# Altium PCB 2.4寸LCD-OM240DN2L.PcbDoc
Units mm, origin at the board's own origin, x right, y up, seen from the top; angles counter-clockwise.
Board outline 54 x 61 mm, 2 copper layers (Top Layer, Bottom Layer), stack 1.571 mm thick; 16 components, 30 nets, 125 pads, 87 vias.
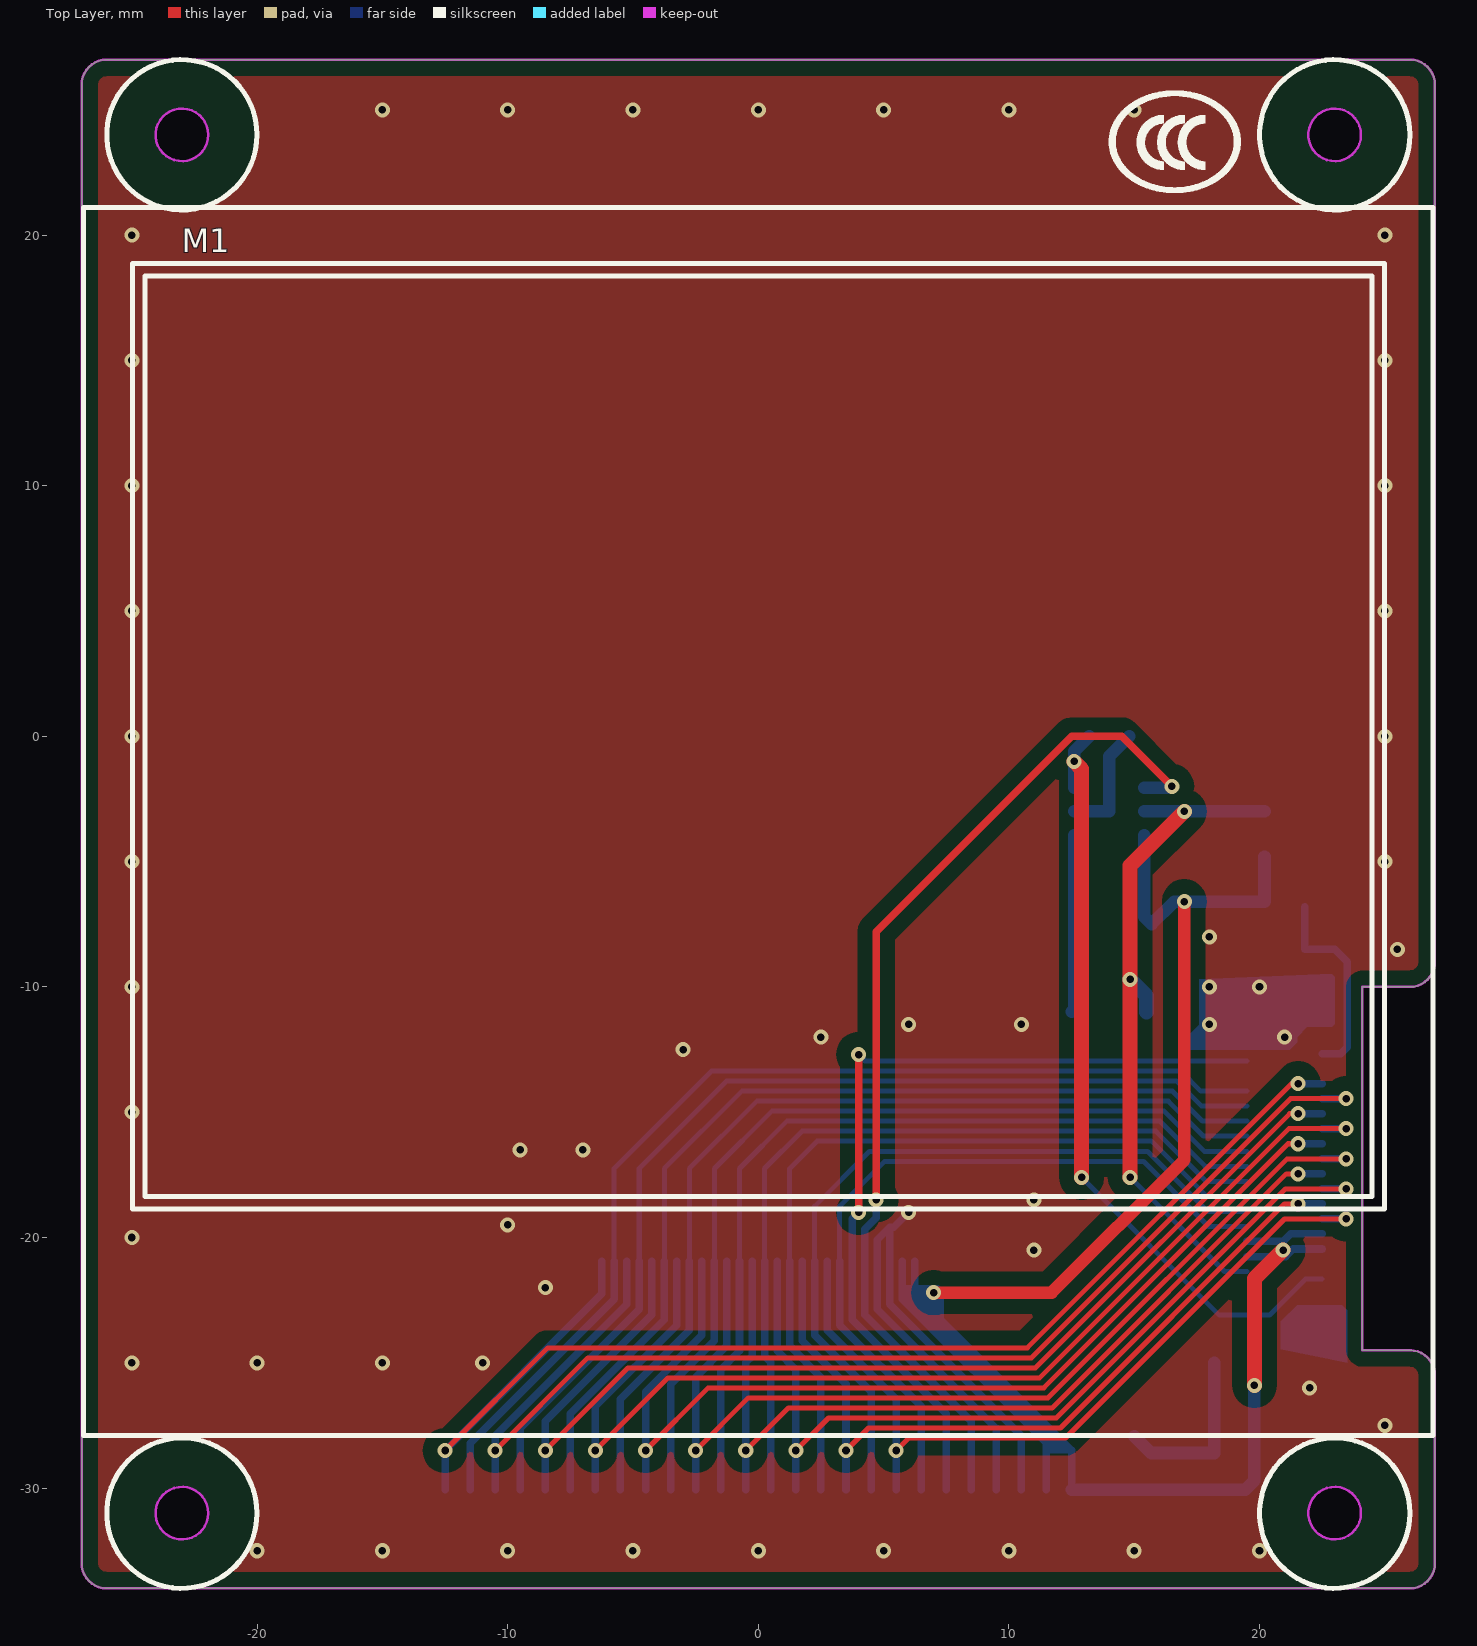
[diagram p0: Top Layer view]
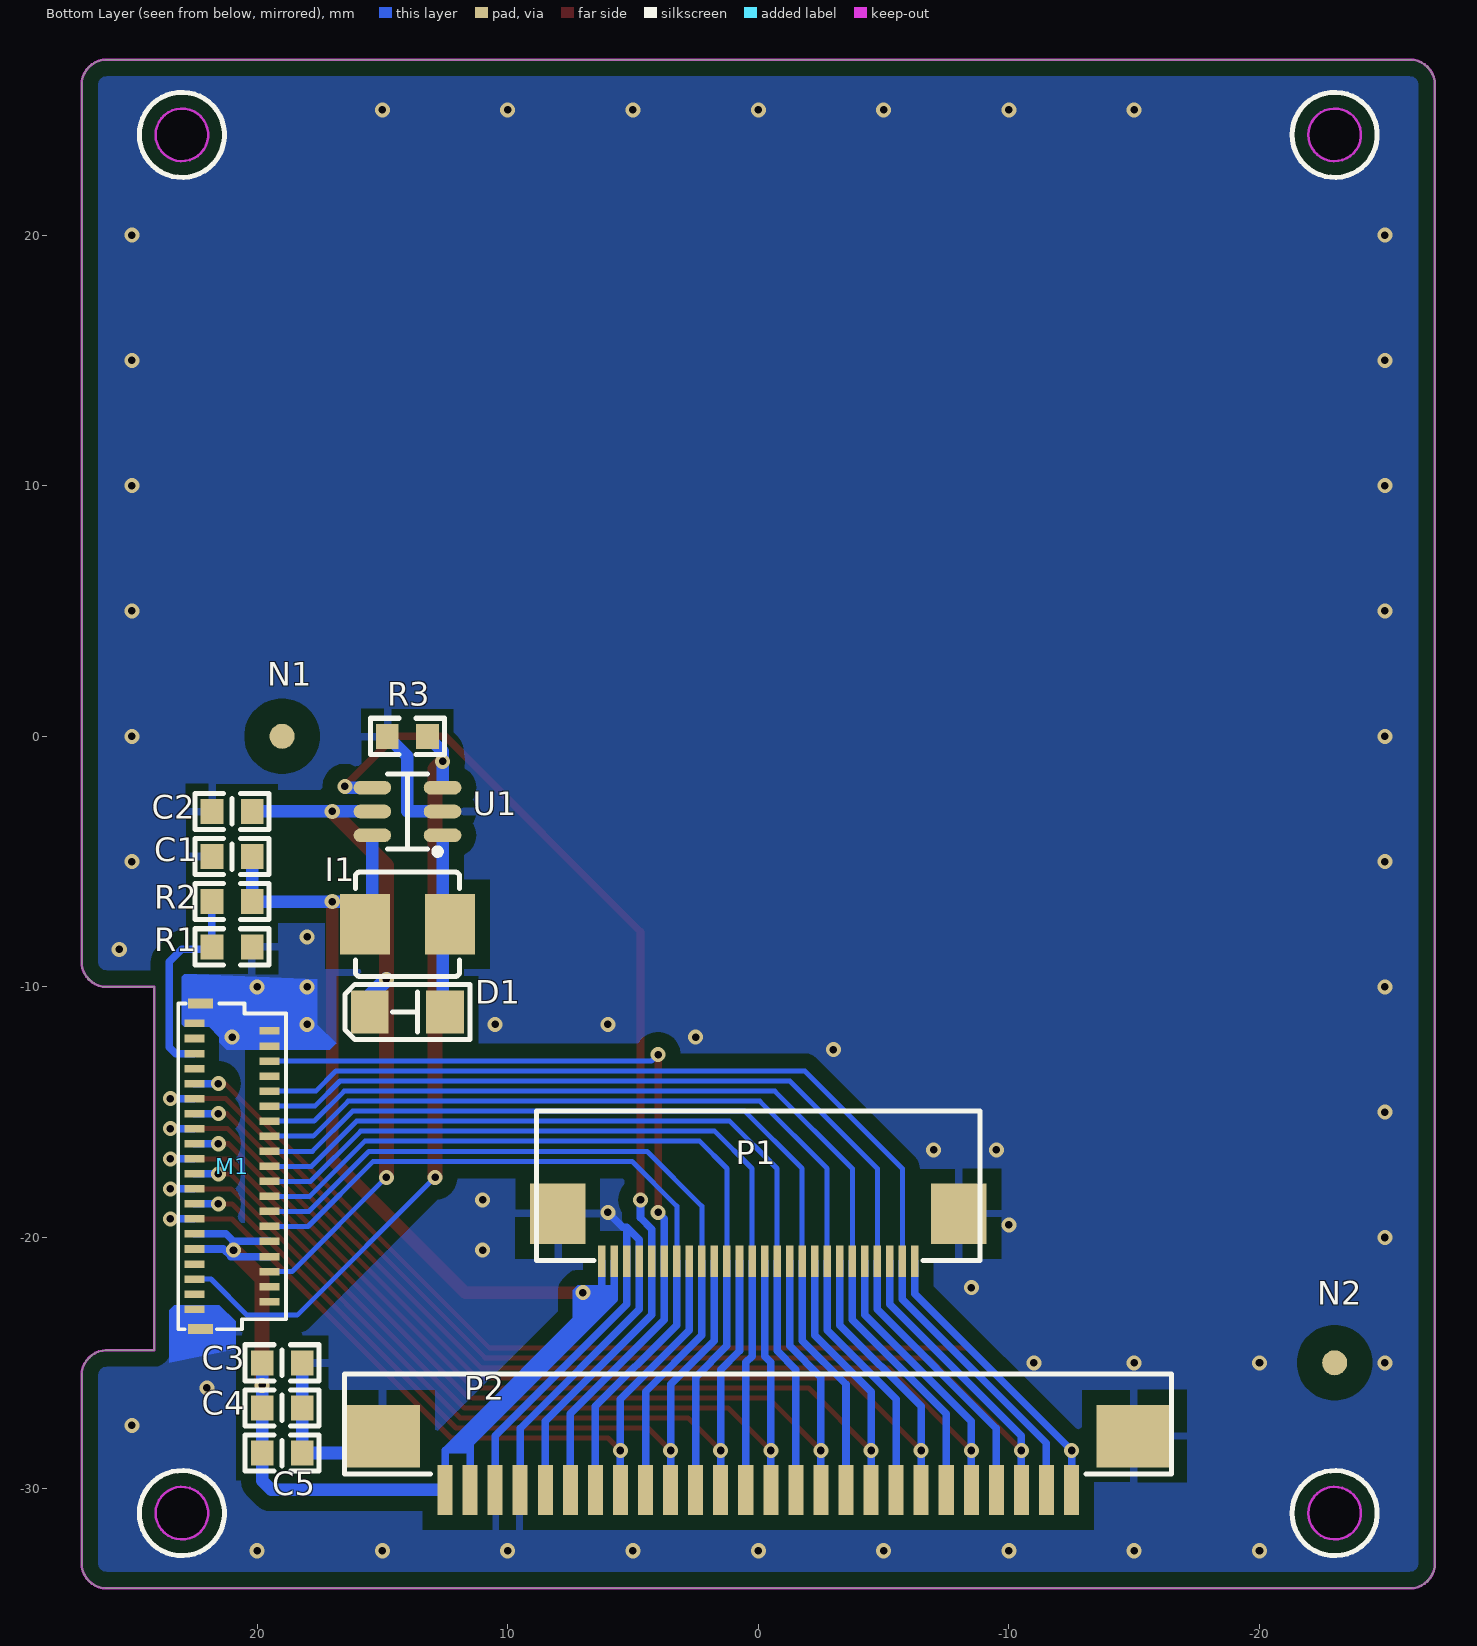
[diagram p1: Bottom Layer view, seen from below]
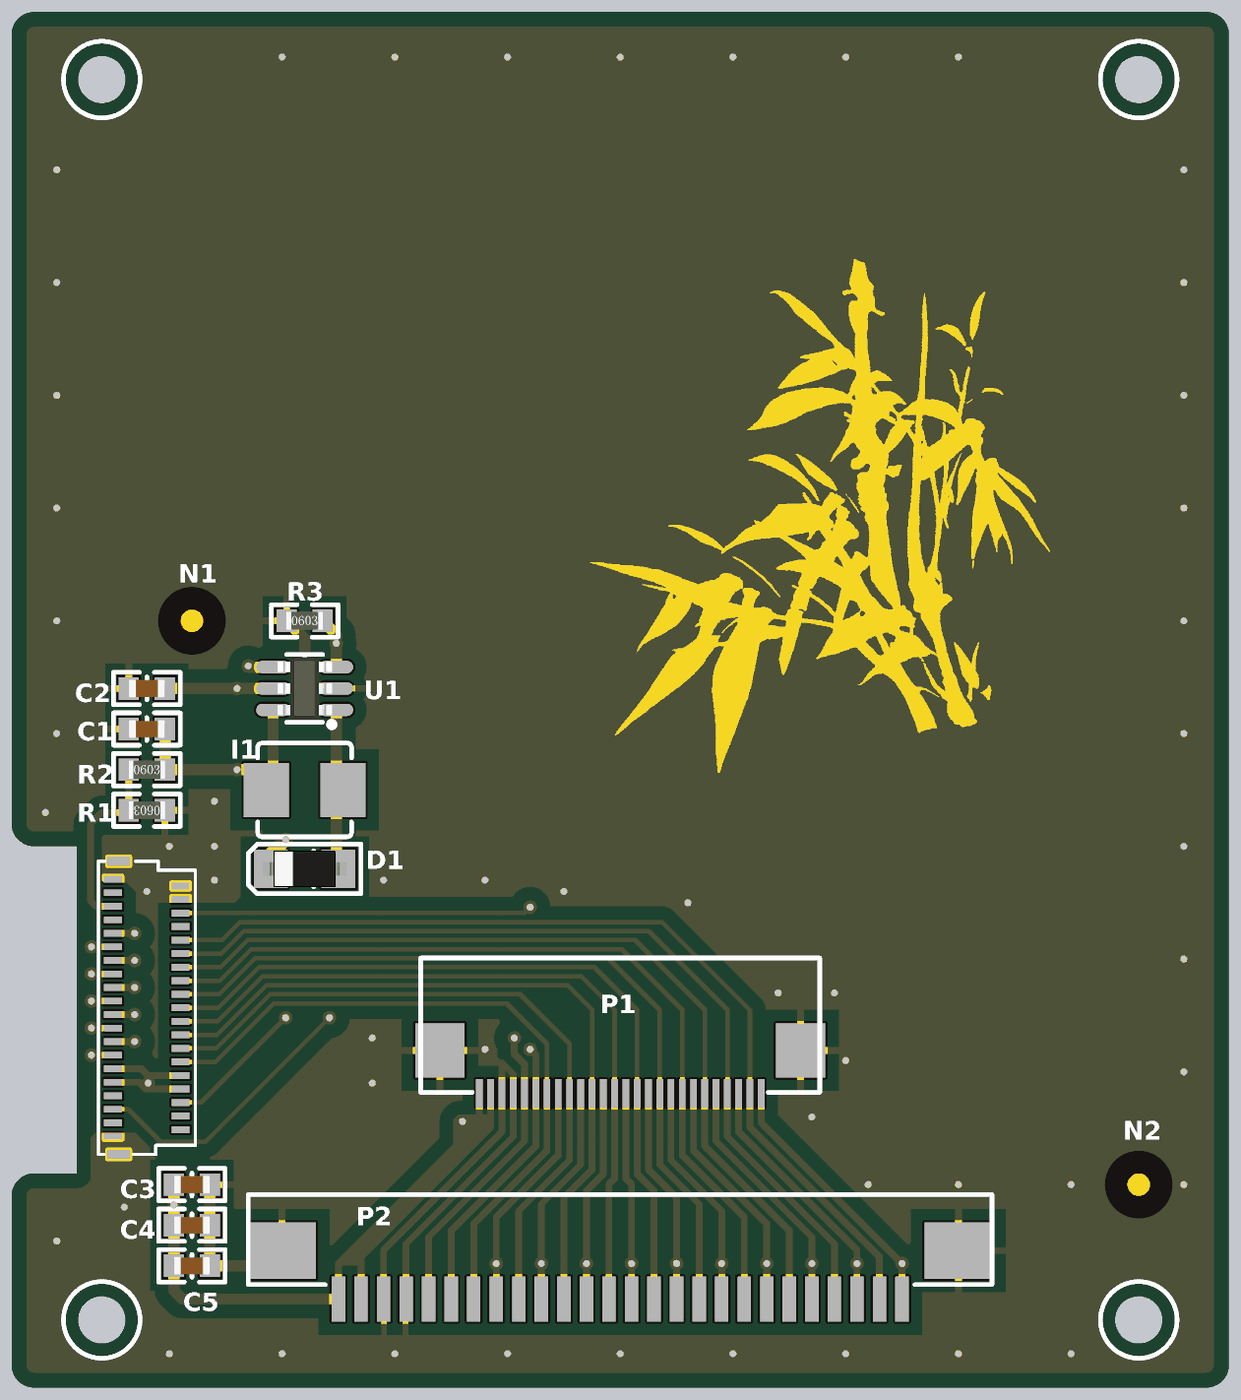
[diagram p2: 3D render of the assembled board from below, using the file's embedded part models]

## Layer stack, top to bottom
Top Solder: solder mask 0.0102, Solder Resist, Dk 3.5
Top Layer: signal copper 0.0356
Dielectric1: dielectric 1.5, FR-4, Dk 4.8
Bottom Layer: signal copper 0.0356
Bottom Solder: solder mask 0.0102, Solder Resist, Dk 3.5

## Board outline
-27,-33 -27,26 cw(c-26,26) -26,27 26,27 cw(c26,26) 27,26 27,-9 cw(c26,-9) 26,-10 24.1,-10 24.1,-24.5 26,-24.5 cw(c26,-25.5) 27,-25.5 27,-33 cw(c26,-33) 26,-34 -26,-34 cw(c-26,-33)
cut-out: -23,-29.95 ccw(c-23,-31) -24.05,-31 ccw(c-23,-31) -23,-32.05 ccw(c-23,-31) -21.95,-31 ccw(c-23,-31)
cut-out: 23,-29.95 ccw(c23,-31) 21.95,-31 ccw(c23,-31) 23,-32.05 ccw(c23,-31) 24.05,-31 ccw(c23,-31)
cut-out: 23,25.05 ccw(c23,24) 21.95,24 ccw(c23,24) 23,22.95 ccw(c23,24) 24.05,24 ccw(c23,24)
cut-out: -23,25.05 ccw(c-23,24) -24.05,24 ccw(c-23,24) -23,22.95 ccw(c-23,24) -21.95,24 ccw(c-23,24)

## Design rules (kind name [scope] priority, off if disabled: settings)
Clearance Clearance敷铜间隔 [InPolygon] p1: gap=0.6
Clearance Clearance通用间隔 [All] p2: gap=0.2
PlaneConnect [All] p1: planeconnectstyle=Relief reliefexpansion=0.508 reliefentries=4 reliefconductorwidth=0.3 reliefairgap=0.3
PolygonConnect PolygonConnect_过孔 [All vs IsVia] p1: connectstyle=Direct reliefconductorwidth=0.254 reliefentries=4 polygonreliefangle="90 Angle" airgapwidth=0.254
PolygonConnect [All] p2: connectstyle=Relief reliefconductorwidth=0.3 reliefentries=4 polygonreliefangle="90 Angle" airgapwidth=0.6
RoutingVias [All] p1: holewidth=0.5 width=1 viastyle="Through Hole" minholewidth=0.4 minwidth=0.8 maxholewidth=10 maxwidth=10
SolderMaskExpansion [All] p1: expansion=0.102
Width [All] p1: maxlimit=10 minlimit=0.2 preferedwidth=0.5
29 further rules are at their usual default settings.

## Components (designator, comment, footprint, x,y, rotation, side; value= is the part's Value field where it differs from the comment)
C1 "106" C-0603 21,-4.8 r180 bottom
C2 "106" C-0603 21,-3 r180 bottom
C3 "104" C-0603 19,-25 r0 bottom
C4 "105" C-0603 19,-26.8 r0 bottom
C5 "106" C-0603 19,-28.6 r0 bottom
D1 "SS18" D-1206 14,-11 r180 bottom
I1 "22UH" 一体成型电感0420 14,-7.5 r180 bottom
M1 "OM240DN2L" OM240DN2L 0,0 r0 top locked
N1 "光学定位点" MARK-1mm-3mm 19,0 r270 bottom
N2 "光学定位点" MARK-1mm-3mm -23,-25 r270 bottom
P1 "FPC0.5mm-26p" FPC-0.5MM_26P下接翻盖 0,-20 r180 bottom
P2 "FPC1mm-26p" FPC-1.0MM_26P下接翻盖 0,-29 r180 bottom
R1 "0" R-0603 21,-8.4 r0 bottom
R2 "NC" R-0603 21,-6.6 r180 bottom
R3 "10" R-0603 14,0 r180 bottom
U1 "ME2212AM6G" SOT-23-6-M 14,-3 r180 bottom

## Footprints (in the part's own frame and the unit in brackets; to place one, negate y for a bottom-side part, rotate by r counter-clockwise, add the part's x,y. Pads: shape width x height; smd on the part's side, far side on the other; paste and mask are expansions set on the pad)
C-0603 [mm]
  rect 0.9x1 smd: 1(-0.8,0) 2(0.8,0)
  silkscreen extent -1.48,-0.72 1.48,0.72, body extent -0.8,-0.4 0.8,0.4, height 0.6
D-1206 [mm] "4148"
  rect 1.5x1.7 smd: 1(1.5,0) 2(-1.5,0)
  silkscreen extent -2.5,-1.1 2.5,1.1, body extent -1.85,-0.8 1.85,0.8, height 1.28
FPC-0.5MM_26P下接翻盖 [mm]
  rect 0.3x1.25 smd: 1(-6.25,-0.95) 2(-5.75,-0.95) 3(-5.25,-0.95) 4(-4.75,-0.95) 5(-4.25,-0.95) 6(-3.75,-0.95) 7(-3.25,-0.95) 8(-2.75,-0.95) 9(-2.25,-0.95) 10(-1.75,-0.95) 11(-1.25,-0.95) 12(-0.75,-0.95) 13(-0.25,-0.95) 14(0.25,-0.95) 15(0.75,-0.95) 16(1.25,-0.95) 17(1.75,-0.95) 18(2.25,-0.95) 19(2.75,-0.95) 20(3.25,-0.95) 21(3.75,-0.95) 22(4.25,-0.95) 23(4.75,-0.95) 24(5.25,-0.95) 25(5.75,-0.95) 26(6.25,-0.95)
  rect 2.2x2.4 smd: 27(8,0.95) 28(-8,0.95)
  silkscreen extent -8.85,-0.91 8.85,5.05
FPC-1.0MM_26P下接翻盖 [mm]
  rect 0.6x2 smd: 1(-12.5,-1.075) 2(-11.5,-1.075) 3(-10.5,-1.075) 4(-9.5,-1.075) 5(-8.5,-1.075) 6(-7.5,-1.075) 7(-6.5,-1.075) 8(-5.5,-1.075) 9(-4.5,-1.075) 10(-3.5,-1.075) 11(-2.5,-1.075) 12(-1.5,-1.075) 13(-0.5,-1.075) 14(0.5,-1.075) 15(1.5,-1.075) 16(2.5,-1.075) 17(3.5,-1.075) 18(4.5,-1.075) 19(5.5,-1.075) 20(6.5,-1.075) 21(7.5,-1.075) 22(8.5,-1.075) 23(9.5,-1.075) 24(10.5,-1.075) 25(11.5,-1.075) 26(12.5,-1.075)
  rect 3x2.5 smd: 27(-15,1.075) 28(15,1.075)
  silkscreen extent -16.51,-0.44 16.49,3.56
MARK-1mm-3mm [mm]
  round 1 smd paste-0.6 mask+1: 1(0,0)
  Top Layer pour cut-out: -1.5,0 -1.386,-0.574 -1.061,-1.061 -0.574,-1.386 0,-1.5 0,-1.5 0.574,-1.386 1.061,-1.061 1.386,-0.574 1.5,0 1.5,0 1.386,0.574 1.061,1.061 0.574,1.386 0,1.5 0,1.5 -0.574,1.386 -1.061,1.061 -1.386,0.574 -1.5,0
OM240DN2L [mm]
  rect 0.8x0.3 smd far side: 1(22.5,-11.459) 2(19.5,-11.759) 3(22.5,-12.059) 4(19.5,-12.359) 5(22.5,-12.659) 6(19.5,-12.959) 7(22.5,-13.259) 8(19.5,-13.559) 9(22.5,-13.859) 10(19.5,-14.159) 11(22.5,-14.459) 12(19.5,-14.759) 13(22.5,-15.059) 14(19.5,-15.359) 15(22.5,-15.659) 16(19.5,-15.959) 17(22.5,-16.259) 18(19.5,-16.559) 19(22.5,-16.859) 20(19.5,-17.159) 21(22.5,-17.459) 22(19.5,-17.759) 23(22.5,-18.059) 24(19.5,-18.359) 25(22.5,-18.659) 26(19.5,-18.959) 27(22.5,-19.259) 28(19.5,-19.559) 29(22.5,-19.859) 30(19.5,-20.159) 31(22.5,-20.459) 32(19.5,-20.759) 33(22.5,-21.059) 34(19.5,-21.359) 35(22.5,-21.659) 36(19.5,-21.959) 37(22.5,-22.259) 38(19.5,-22.559) 39(22.5,-22.859)
  rect 1x0.4 smd far side: 40(22.25,-10.659) 41(22.25,-23.659)
  silkscreen extent -26.93,-27.91 26.93,21.11, body extent -26.93,-27.91 26.93,21.11, height 2.2
R-0603 [mm]
  rect 0.9x1 smd: 1(-0.8,0) 2(0.8,0)
  silkscreen extent -1.48,-0.72 1.48,0.72, body extent -0.8,-0.4 0.8,0.4, height 0.45
SOT-23-6-M [mm]
  oval 1.5x0.55 smd: 1(1.4,-0.95) 2(1.4,0) 3(1.4,0.95) 4(-1.4,0.95) 5(-1.4,0) 6(-1.4,-0.95)
  silkscreen extent -0.8,-1.7 1.3,1.5, body extent -1.21,-1.4 1.21,1.4, height 1.08
一体成型电感0420 [mm]
  rect 2x2.4 smd: 1(-1.7,0) 2(1.7,0)
  silkscreen extent -2.08,-2.08 2.08,2.08, body extent -2.08,-2.08 2.08,2.08, height 2

## Part data
C1 C2 C3 C4 C5: library part Cap-0603, "0805"
D1: library part SS14, "SMA"
I1: library part Inductance3
N1 N2: library part 无引脚
P1 P2: library part "Header 28", "Header, 28-Pin"
R1 R2 R3: library part Res2-0603, "0603"
U1: "LED升压恒流"

## Via types
v1: diameter 0.6, hole 0.3, Top Layer to Bottom Layer, tented both sides, 87 vias

## Nets (pads, with @x,y where several pads share a name; then routed paths per layer and width w, separated by ;. In a path a pad name is that pad's centre, name@x,y a point inside that pad or via, vN(x,y) a via of type N, cw(c..) or ccw(c..) an arc to the next point about the centre after c; other vN are vias at no path point)
3.3V: C1.2 C3.2 C4.2 C5.2 I1.1 M1.29 M1.30 M1.31 M1.32 P1.1 P1.2 P2.1 P2.2 R2.2 U1.6 | length 81.7
  Top Layer w0.5: v1(7,-22.2) 11.7,-22.2 17,-16.9 v1(17,-6.6)
  Top Layer w0.6: v1(19.8,-25.9) 19.8,-21.641 v1(20.941,-20.5)
  Bottom Layer w0.3: P1.2 5.75,-22.457 11.5,-28.207 ; P1.1 6.25,-22.25 12.5,-28.5 P2.1 ; P2.2 11.5,-28.207 ; 12.193,-28.207 11.5,-28.207 ; M1.32 v1@21.041,-20.759 ; M1.30 20.941,-20.159 ; M1.31 21.341,-20.459 v1@21.041,-20.759 ; M1.29 21.241,-19.859 20.941,-20.159 ; 20.941,-20.159 v1(20.941,-20.5) 20.941,-20.659 v1@21.041,-20.759
  Bottom Layer w0.5: P2.1 19.425,-30.075 19.8,-29.7 C5.2 C4.2 C3.2 ; U1.6 15.4,-7.2 I1.1 16.6,-6.6 v1(17,-6.6) R2.2 C1.2
CS: M1.28 P1.7 P2.7 | length 30.7
  Bottom Layer w0.2: P1.7 3.25,-18.75 5.041,-16.959 15.368,-16.959 17.968,-19.559 M1.28
  Bottom Layer w0.3: P1.7 3.25,-23.493 6.5,-26.743 P2.7
D0: M1.24 P1.11 P2.11 | length 33
  Bottom Layer w0.2: P1.11 1.25,-17.25 2.341,-16.159 15.699,-16.159 17.899,-18.359 M1.24
  Bottom Layer w0.3: P1.11 1.25,-24.321 2.5,-25.571 P2.11
D1: M1.23 P1.12 P2.12 | length 36.7
  Top Layer w0.2: v1(1.5,-28.5) 2.8,-27.2 11.893,-27.2 21.034,-18.059 v1(23.459,-18.059)
  Bottom Layer w0.3: P1.12 0.75,-24.528 1.5,-25.278 v1(1.5,-28.5) P2.12 ; M1.23 v1(23.459,-18.059)
D2: M1.22 P1.13 P2.13 | length 33.6
  Bottom Layer w0.2: P1.13 0.25,-17.25 1.741,-15.759 15.865,-15.759 17.865,-17.759 M1.22
  Bottom Layer w0.3: P1.13 0.25,-24.735 0.5,-24.985 P2.13
D3: M1.21 P1.14 P2.14 | length 36.8
  Top Layer w0.2: v1(-0.5,-28.5) 1.2,-26.8 11.728,-26.8 21.069,-17.459 v1(21.541,-17.459)
  Bottom Layer w0.3: P2.14 -0.5,-24.985 -0.25,-24.735 P1.14 ; v1(21.541,-17.459) M1.21
D4: M1.20 P1.15 P2.15 | length 34.9
  Bottom Layer w0.2: P1.15 -0.75,-17.25 1.141,-15.359 16.031,-15.359 17.831,-17.159 M1.20
  Bottom Layer w0.3: P2.15 -1.5,-25.278 -0.75,-24.528 P1.15
D5: M1.19 P1.16 P2.16 | length 41.4
  Top Layer w0.2: v1(-2.5,-28.5) -0.4,-26.4 11.562,-26.4 21.103,-16.859 v1(23.459,-16.859)
  Bottom Layer w0.3: P2.16 -2.5,-25.571 -1.25,-24.321 P1.16 ; M1.19 v1(23.459,-16.859)
D6: M1.18 P1.17 P2.17 | length 36.4
  Bottom Layer w0.2: P1.17 -1.75,-17.25 0.541,-14.959 16.196,-14.959 17.796,-16.559 M1.18
  Bottom Layer w0.3: P2.17 -3.5,-25.864 -1.75,-24.114 P1.17
D7: M1.17 P1.18 P2.18 | length 42.1
  Top Layer w0.2: v1(-4.5,-28.5) -2,-26 11.396,-26 21.137,-16.259 v1(21.541,-16.259)
  Bottom Layer w0.3: P2.18 -4.5,-26.157 -2.25,-23.907 P1.18 ; v1(21.541,-16.259) M1.17
D8: M1.16 P1.19 P2.19 | length 37.9
  Bottom Layer w0.2: P1.19 -2.75,-17.25 -0.059,-14.559 16.362,-14.559 17.762,-15.959 M1.16
  Bottom Layer w0.3: P2.19 -5.5,-26.45 -2.75,-23.7 P1.19
D9: M1.15 P1.20 P2.20 | length 46.7
  Top Layer w0.2: v1(-6.5,-28.5) -3.6,-25.6 11.231,-25.6 21.172,-15.659 v1(23.459,-15.659)
  Bottom Layer w0.3: P2.20 v1(-6.5,-28.5) -6.5,-26.743 -3.25,-23.493 P1.20 ; M1.15 v1(23.459,-15.659)
D10: M1.14 P1.21 P2.21 | length 39.4
  Bottom Layer w0.2: P1.21 -3.75,-17.25 -0.659,-14.159 16.528,-14.159 17.728,-15.359 M1.14
  Bottom Layer w0.3: P2.21 -7.5,-27.036 -3.75,-23.286 P1.21
D11: M1.13 P1.22 P2.22 | length 47.5
  Top Layer w0.2: v1(-8.5,-28.5) -5.2,-25.2 11.065,-25.2 21.206,-15.059 v1(21.541,-15.059)
  Bottom Layer w0.3: P2.22 v1(-8.5,-28.5) -8.5,-27.328 -4.25,-23.078 P1.22 ; v1(21.541,-15.059) M1.13
D12: M1.12 P1.23 P2.23 | length 40.9
  Bottom Layer w0.2: P1.23 -4.75,-17.25 -1.259,-13.759 16.693,-13.759 17.693,-14.759 M1.12
  Bottom Layer w0.3: P2.23 -9.5,-27.621 -4.75,-22.871 P1.23
D13: M1.11 P1.24 P2.24 | length 52
  Top Layer w0.2: v1(-10.5,-28.5) -6.8,-24.8 10.899,-24.8 21.24,-14.459 v1(23.459,-14.459)
  Bottom Layer w0.3: P2.24 v1(-10.5,-28.5) -10.5,-27.914 -5.25,-22.664 P1.24 ; M1.11 v1(23.459,-14.459)
D14: M1.10 P1.25 P2.25 | length 42.4
  Bottom Layer w0.2: P1.25 -5.75,-17.25 -1.859,-13.359 16.859,-13.359 17.659,-14.159 M1.10
  Bottom Layer w0.3: P2.25 -11.5,-28.207 -5.75,-22.457 P1.25
D15: M1.9 P1.26 P2.26 | length 52.8
  Top Layer w0.2: v1(-12.5,-28.5) -8.4,-24.4 10.734,-24.4 21.275,-13.859 v1(21.541,-13.859)
  Bottom Layer w0.3: P2.26 v1(-12.5,-28.5) -6.25,-22.25 P1.26 ; v1(21.541,-13.859) M1.9
D16: M1.8
D17: M1.7
GND: C1.1 C2.1 C3.1 C4.1 C5.1 M1.1 M1.2 M1.4 M1.39 M1.40 M1.41 P1.3 P1.4 P1.27 P1.28 P2.3 P2.4 P2.27 P2.28 R1.1 R3.1 U1.2 | length 43.7
  Bottom Layer w0.2: M1.4 20.341,-12.359 20.5,-12.2 20.5,-11.8 20.541,-11.759 ; M1.2 20.541,-11.759 ; M1.40 22.5,-10.909 M1.1 20.841,-11.459 20.541,-11.759
  Bottom Layer w0.3: v1(6,-19) 5.404,-19.596 5.25,-19.596 ; P2.4 9.5,-27.621 4.75,-22.871 P1.4 4.75,-20.096 5.25,-19.596 ; P2.3 10.5,-27.914 5.25,-22.664 P1.3 5.25,-19.596
  Bottom Layer w0.5: U1.2 14,-3 14,-0.8 R3.1 ; P2.27 15.675,-28.6 C5.1 C4.1 C3.1
  other v1: -20,-32.5 -15,-32.5 -10,-32.5 -5,-32.5 0,-32.5 5,-32.5 10,-32.5 15,-32.5 20,-32.5 25,-27.5 22,-26 -25,-25 -20,-25 -15,-25 -11,-25 -8.5,-22 11,-20.5 -25,-20 -10,-19.5 11,-18.5 -9.5,-16.5 -7,-16.5 -25,-15 -3,-12.5 2.5,-12 21,-12 6,-11.5 10.5,-11.5 18,-11.5 -25,-10 18,-10 20,-10 25.5,-8.5 18,-8 -25,-5 25,-5 -25,0 25,0 -25,5 25,5 -25,10 25,10 -25,15 25,15 -25,20 25,20 -15,25 -10,25 -5,25 0,25 5,25 10,25 15,25
LED+: C2.2 D1.2 M1.34 U1.5 | length 28.1
  Top Layer w0.6: v1(14.841,-17.6) v1(14.841,-9.7) 14.841,-5.159 v1(17,-3)
  Bottom Layer w0.2: v1(14.841,-17.6) 18.6,-21.359 M1.34
  Bottom Layer w0.5: U1.5 C2.2@20.2,-3
  Bottom Layer w0.6: v1(14.841,-9.7) 15.5,-10.359 D1.2
LED-: M1.35 R3.2 U1.3 | length 31.5
  Top Layer w0.6: v1(12.6,-1) 12.9,-1.3 v1(12.9,-17.6)
  Bottom Layer w0.2: v1(12.9,-17.6) 18.4,-23.1 20.4,-23.1 21.841,-21.659 M1.35
  Bottom Layer w0.5: U1.3 12.6,-0.6 R3.2
NetD1_1: D1.1 I1.2 U1.1 | length 7.1
  Bottom Layer w0.5: D1.1 12.6,-10.9 U1.1
NetM1_5: M1.5 R1.2 R2.1 | length 8.1
  Bottom Layer w0.3: R2.1@21.8,-6.8 21.8,-8.5 23,-8.5 23.5,-9 23.5,-12.4 23.241,-12.659 M1.5
RD: M1.25 P1.10 P2.10 | length 32.9
  Top Layer w0.2: v1(3.5,-28.5) 4.4,-27.6 12.059,-27.6 21,-18.659 v1(21.541,-18.659)
  Bottom Layer w0.3: P1.10 1.75,-24.114 3.5,-25.864 v1(3.5,-28.5) P2.10 ; v1(21.541,-18.659) M1.25
RS: M1.27 P1.8 P2.8 | length 33
  Top Layer w0.2: v1(5.5,-28.5) 6,-28 12.259,-28 21,-19.259 v1(23.459,-19.259)
  Bottom Layer w0.3: P1.8 2.75,-23.7 5.5,-26.45 P2.8 ; M1.27 v1(23.459,-19.259)
RST: M1.6 P1.6 P2.6 | length 34.6
  Top Layer w0.3: v1(4,-19) v1(4,-12.7)
  Bottom Layer w0.2: v1(4,-12.7) 4.259,-12.959 M1.6
  Bottom Layer w0.3: v1(4,-19) 3.75,-19.25 P1.6 3.75,-23.286 7.5,-27.036 P2.6
WR: M1.26 P1.9 P2.9 | length 31.4
  Bottom Layer w0.2: P1.9 2.25,-18.75 4.441,-16.559 15.534,-16.559 17.934,-18.959 M1.26
  Bottom Layer w0.3: P1.9 2.25,-23.907 4.5,-26.157 P2.9
背光使能: P1.5 P2.5 U1.4 | length 41.2
  Top Layer w0.3: v1(4.7,-18.5) 4.7,-7.8 12.5,0 14.5,0 v1(16.5,-2)
  Bottom Layer w0.3: v1(4.7,-18.5) 4.7,-19.219 4.25,-19.669 P1.5 4.25,-23.078 8.5,-27.328 P2.5
  Bottom Layer w0.5: U1.4 16.45,-2.05 v1(16.5,-2)
pads on no net: M1.3 M1.33 M1.36 M1.37 M1.38 N1.1 N2.1

## Polygon pours and split planes (outlines as drawn)
GND on Top Layer "Mechanical 15-No Net" (solid, remove dead copper, pour order 0): -26,27 ccw(c-26,26) -27,26 -27,-33 ccw(c-26,-33) -26,-34 26,-34 ccw(c26,-33) 27,-33 27,-25.5 ccw(c26,-25.5) 26,-24.5 24.1,-24.5 24.1,-10 26,-10 ccw(c26,-9) 27,-9 27,26 ccw(c26,26) 26,27
GND on Bottom Layer "Mechanical 15-No Net" (solid, remove dead copper, pour order 2): -26,27 ccw(c-26,26) -27,26 -27,-33 ccw(c-26,-33) -26,-34 26,-34 ccw(c26,-33) 27,-33 27,-25.5 ccw(c26,-25.5) 26,-24.5 24.1,-24.5 24.1,-10 26,-10 ccw(c26,-9) 27,-9 27,26 ccw(c26,26) 26,27

## Keep-outs
Keep-Out Layer:
  circle w0.1: c-23,-31 r1.05
  circle w0.1: c23,-31 r1.05
  circle w0.1: c23,24 r1.05
  circle w0.1: c-23,24 r1.05
  lines w0.1: -27,-33 ccw(c-26,-33) -26,-34 26,-34 ccw(c26,-33) 27,-33 27,-25.5 ccw(c26,-25.5) 26,-24.5 24.1,-24.5 24.1,-10 26,-10 ccw(c26,-9) 27,-9 27,26 ccw(c26,26) 26,27 -26,27 ccw(c-26,26) -27,26 -27,-33

## Other copper
Top Layer:
  pour cut-out: -24.7,-31 ccw(c-23,-31) -23,-32.7 ccw(c-23,-31) -21.3,-31 ccw(c-23,-31) -23,-29.3 ccw(c-23,-31)
  pour cut-out: -26,-31 ccw(c-23,-31) -23,-34 ccw(c-23,-31) -20,-31 ccw(c-23,-31) -23,-28 ccw(c-23,-31)
  pour cut-out: 21.3,-31 ccw(c23,-31) 23,-32.7 ccw(c23,-31) 24.7,-31 ccw(c23,-31) 23,-29.3 ccw(c23,-31)
  pour cut-out: 20,-31 ccw(c23,-31) 23,-34 ccw(c23,-31) 26,-31 ccw(c23,-31) 23,-28 ccw(c23,-31)
  pour cut-out: 20,24 ccw(c23,24) 23,21 ccw(c23,24) 26,24 ccw(c23,24) 23,27 ccw(c23,24)
  pour cut-out: 21.3,24 ccw(c23,24) 23,22.3 ccw(c23,24) 24.7,24 ccw(c23,24) 23,25.7 ccw(c23,24)
  pour cut-out: -26,24 ccw(c-23,24) -23,21 ccw(c-23,24) -20,24 ccw(c-23,24) -23,27 ccw(c-23,24)
  pour cut-out: -24.7,24 ccw(c-23,24) -23,22.3 ccw(c-23,24) -21.3,24 ccw(c-23,24) -23,25.7 ccw(c-23,24)
Bottom Layer:
  region net GND: 22.4,-9.5 22.9,-9.5 23,-9.6 23,-11.5 22.9,-11.6 21.9,-11.6 21.5,-12 21.5,-12.209 21.209,-12.5 17.097,-12.5 16.85,-12.253 17.6,-11.503 17.6,-9.7
  region net GND: 23.5,-25 23.5,-22.9 23.3,-22.7 21.5,-22.7 20.85,-23.35 20.85,-24.459
  region net 3.3V: 7.4,-23.4 12.5,-28.5 12.4,-28.6 11.6,-28.6 11.6,-28.4 7.1,-23.9
  region net 3.3V: 5.75,-21.9 7.2,-21.9 7.4,-22.1 7.4,-23.9 7.3,-24 5.757,-22.457 5.75,-22.457

## Silkscreen, mask and mechanical layers (free items; w line width, h text height)
Top Overlay:
  drawing of 1127 lines, arcs and shapes, not listed
Bottom Overlay:
  circle w0.2: c-23,-31 r1.7
  circle w0.2: c23,-31 r1.7
  circle w0.2: c23,24 r1.7
  circle w0.2: c-23,24 r1.7
Top Solder:
  drawing of 5285 lines, arcs and shapes, not listed
Bottom Solder:
  drawing of 5285 lines, arcs and shapes, not listed
Mechanical 15:
  lines w0.2: -41,-102 47,-102 ; -41,-96 47,-96 ; -41,-90 47,-90 ; -41,-84 47,-84 ; -41,-78 47,-78 ; -41,-72 47,-72 ; -41,-66 47,-66 ; -19,-108 -19,-60 -19,-54 ; -41,-60 -41,-54 47,-54 47,-60 ; -41,-60 47,-60 ; -41,-60 -41,-108 47,-108 47,-60
  text "公司" at -40,-59 h5
  text "杭州久天科技有限公司" at -16,-59 h5
  text "工程" at -40,-65 h5
  text "设计" at -40,-71 h5
  text "邵宁鹏" at -16,-71 h5
  text "日期" at -40,-77 h5
  text "板厚" at -40,-83 h5
  text "1.2mm" at -16,-83 h5
  text "阻焊油" at -40,-89 h5
  text "绿色" at -16,-89 h5
  text "丝印" at -40,-95 h5
  text "白色" at -16,-95 h5
  text "板材" at -40,-101 h5
  text "FR-4" at -16,-101 h5
  text "其他" at -40,-107 h5
  text "有铅喷锡，过孔盖油" at -16,-107 h5

## Dimensions
27.5,-34 to 27.5,27 on Mechanical 15
-27,-35 to 27,-35 on Mechanical 15

## Text inside footprints (layer, text, board x,y; h text height)
M1: Mechanical 15 "Pixel Pitch:0.051X0.153" at -20,6 h2; Mechanical 15 "320XRGB*240DOTS" at -20,8 h2; Mechanical 15 "2.41'qVGA" at -20,10 h2; Mechanical 15 "RGB" at -20,13 h3